# EAGLE board M_L_ext_switch_2 (EAGLE 9.6.2)
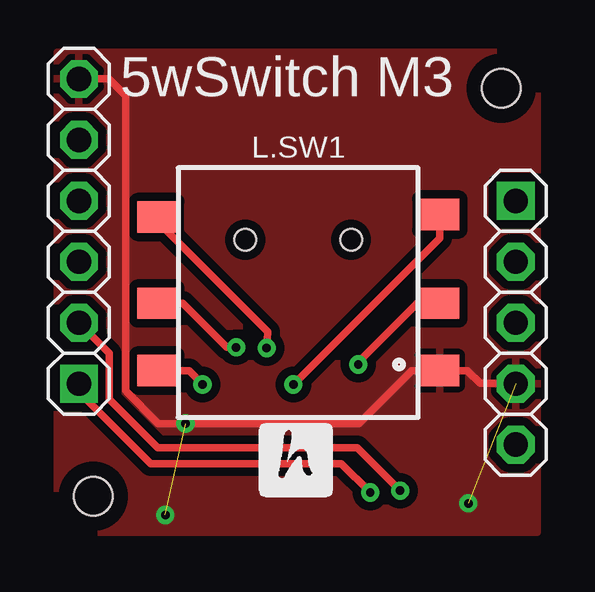
[diagram p0: board, top side]
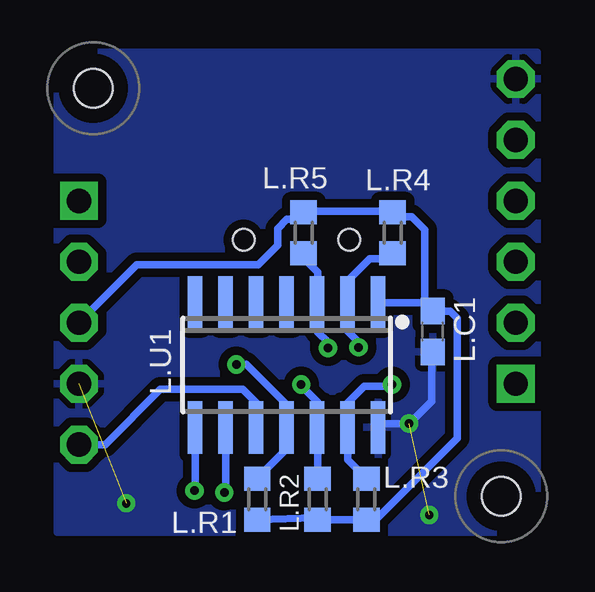
[diagram p1: board, bottom side, seen from below]

No outline drawn. Coordinates in mm, seen from the top.
Copper layers (1*16): Top 0.035mm / dielectric 1.5mm / Bottom 0.035mm
Design rules "default *": minimum track width 12mil, minimum drill 0.35mm, track to track 14mil, track to pad 13mil, pad to pad 10mil, via to via 14mil, smd to smd 14mil, copper to edge 15mil, drill to drill 15mil, minimum pad ring 10mil, minimum via ring 8mil, stop-mask expansion 4mil, vias tented up to drill 0mil, thermal gap 10mil
Holes 1.6 mm at 2,2 19,19
tRestrict: area 18,18 to 20,20; area 1,1 to 3,3
bRestrict: area 1,1 to 3,3; area 18,18 to 20,20

## Footprints (pad centres in the part's own frame; a part is rotated, then mirrored left to right if it is on the bottom)
1X06 = drill 1.016 pad 1.575 square: 1 -6.35,0 | drill 1.016 pad 1.575 octagon: 2 -3.81,0; 3 -1.27,0; 4 1.27,0; 5 3.81,0; 6 6.35,0
1X05 = drill 1.016 pad 1.575 square: 1 -5.08,0 | drill 1.016 pad 1.575 octagon: 2 -2.54,0; 3 0,0; 4 2.54,0; 5 5.08,0
C0603 = smd 1.1 x 1: 1 -0.85,0; 2 0.85,0
R0603 = smd 1 x 1.1: 1 -0.85,0; 2 0.85,0
5_WAY_SWITCH = smd 1.6 x 1.3: 1 -6,3; 2 -6,0.2; 3 -6,-3.5; 4 5.8,3; 5 5.8,0.2; 6 5.8,-3.4 | hole 0.9: 2.1,-2.45; -2.3,-2.45
SO14 = smd 0.6 x 2.2: 1 -3.81,-2.6; 2 -2.54,-2.6; 3 -1.27,-2.6; 4 0,-2.6; 5 1.27,-2.6; 6 2.54,-2.6; 7 3.81,-2.6; 8 3.81,2.6; 9 2.54,2.6; 10 1.27,2.6; 11 0,2.6; 12 -1.27,2.6; 13 -2.54,2.6; 14 -3.81,2.6

## Placement (x,y rotation side)
G.J1  [1X06]  1.4,13.04 90 top
G.J2  [1X05]  19.6,9.23 270 top
L.C1  100n  [C0603]  4.85,8.86 90 bottom
L.R1  [R0603]  12.17,1.88 90 bottom
L.R2  [R0603]  9.65,1.88 90 bottom
L.R3  [R0603]  7.62,1.88 270 bottom
L.R4  [R0603]  6.53,12.98 90 bottom
L.R5  [R0603]  10.24,12.98 90 bottom
L.SW1  5_WAY_SWITCH  [5_WAY_SWITCH]  10.44,10.24 180 top
L.U1  AT414  [SO14]  10.95,7.47 180 bottom

## Library data of the parts
G.J1 G.J2 = pinhead2
L.C1 = rcl; SPICEPREFIX: C
L.R1-L.R5 = rcl; SPICEPREFIX: R
L.SW1 = hugo
L.U1 = atmel

## Nets
GND: G.J1.6 G.J2.4 L.C1.1 L.SW1.1 L.U1.14
N$1: G.J1.1 L.U1.9
N$2: G.J1.2 L.U1.8
N$3: G.J2.5 L.U1.10
N$5: L.R5.1 L.SW1.6 L.U1.3
N$6: L.R4.1 L.SW1.5 L.U1.2
N$7: L.R3.1 L.SW1.4 L.U1.13
N$8: L.R2.2 L.SW1.3 L.U1.12
N$9: L.R1.2 L.SW1.2 L.U1.11
VCC: G.J2.3 L.C1.2 L.R1.1 L.R2.1 L.R3.2 L.R4.2 L.R5.2 L.U1.1

## Tracks (layer width: path | path; a pad name or v marks a point on that pad's centre or on a via)
GND  (via drill 0.35)  (2 unrouted)
  Top 0.305: G.J1.6 2.65,19.39 3.36,18.68 3.36,6.39 4.71,5.03 v5.84,5.03 13.06,5.03 15.26,7.24 L.SW1.1 17.58,7.24 18.12,6.7 19.59,6.7 G.J2.4
  Bottom 0.305: L.U1.14 6.98,5.03 v5.84,5.03 4.9,5.97 4.9,7.96 L.C1.1
  other vias: 17.63,1.7 5,1.22
  pour Top (isolate 0.305): 0.5,20.5 0.5,0.5 20.5,0.5 20.5,20.5
  pour Bottom (isolate 0.305): 0.5,20.5 0.5,0.5 20.5,0.5 20.5,20.5
N$1  (via drill 0.35)
  Top 0.305: v13.54,2.16 12.34,3.36 4.39,3.36 1.4,6.35 G.J1.1
  Bottom 0.305: v13.54,2.16 13.49,2.21 L.U1.9
N$2  (via drill 0.35)
  Top 0.305: G.J1.2 2.67,7.96 2.67,6.04 4.69,4.02 13,4.02 v14.78,2.23
  Bottom 0.305: v14.78,2.23 14.76,2.26 L.U1.8
N$3
  Bottom 0.305: G.J2.5 18.51,4.15 16.2,6.45 12.78,6.45 12.22,5.89 L.U1.10
N$5  (via drill 0.35)
  Top 0.305: L.SW1.6 4.64,13.48 9.27,8.85 v9.22,8.18
  Bottom 0.305: L.R5.1 10.24,11.92 9.66,11.34 9.66,10.09 L.U1.3 9.68,8.87 9.22,8.41 v9.22,8.18
N$6  (via drill 0.35)
  Top 0.305: L.SW1.5 5.74,10.04 7.57,8.2 v7.95,8.2
  Bottom 0.305: L.R4.1 6.74,12.13 6.96,11.9 7.49,11.9 8.41,10.98 L.U1.2 8.43,10.04 8.43,8.91 7.95,8.43 v7.95,8.2
N$7  (via drill 0.35)
  Top 0.305: L.SW1.4 5.99,7.24 v6.55,6.66
  Bottom 0.305: L.R3.1 8.41,3.52 L.U1.13 8.41,5.89 7.7,6.58 6.63,6.58 v6.55,6.66
N$8  (via drill 0.35)
  Top 0.305: 16.44,13.41 L.SW1.3 16.44,12.76 v10.34,6.66
  Bottom 0.305: L.R2.2 9.65,4.84 | 9.65,4.84 9.65,5.92 10.34,6.6 v10.34,6.66 | 9.65,4.84 L.U1.12
N$9  (via drill 0.35)
  Top 0.305: L.SW1.2 15.5,10.04 13.04,7.58 v13.04,7.49
  Bottom 0.305: L.R1.2 12.12,2.81 10.95,3.97 L.U1.11 10.95,5.81 12.63,7.49 v13.04,7.49
VCC
  Bottom 0.305: L.R1.1 9.73,1.11 L.R2.1 L.R3.2 7.23,1.03 3.84,4.42 3.84,9.43 4.13,9.71 L.C1.2 | 7.14,10.88 L.U1.1 5.2,10.07 L.C1.2 | G.J2.3 17.18,11.65 12.13,11.65 11.32,12.46 11.32,13.15 10.93,13.55 10.54,13.55 L.R5.2 10.21,13.88 6.58,13.88 L.R4.2 6.35,13.65 5.73,13.65 5.19,13.11 5.19,10.06 L.C1.2

## Text on the board
tPlace: 5wSwitch M3